# Altium PCB 频率PWM控制均可调模块.PcbDoc
Units mm, origin at the board's own origin, x right, y up, seen from the top; angles counter-clockwise.
Board outline 152.4 x 101.6 mm, 2 copper layers (Top Layer, Bottom Layer); 16 components, 12 nets, 53 pads, 0 vias.
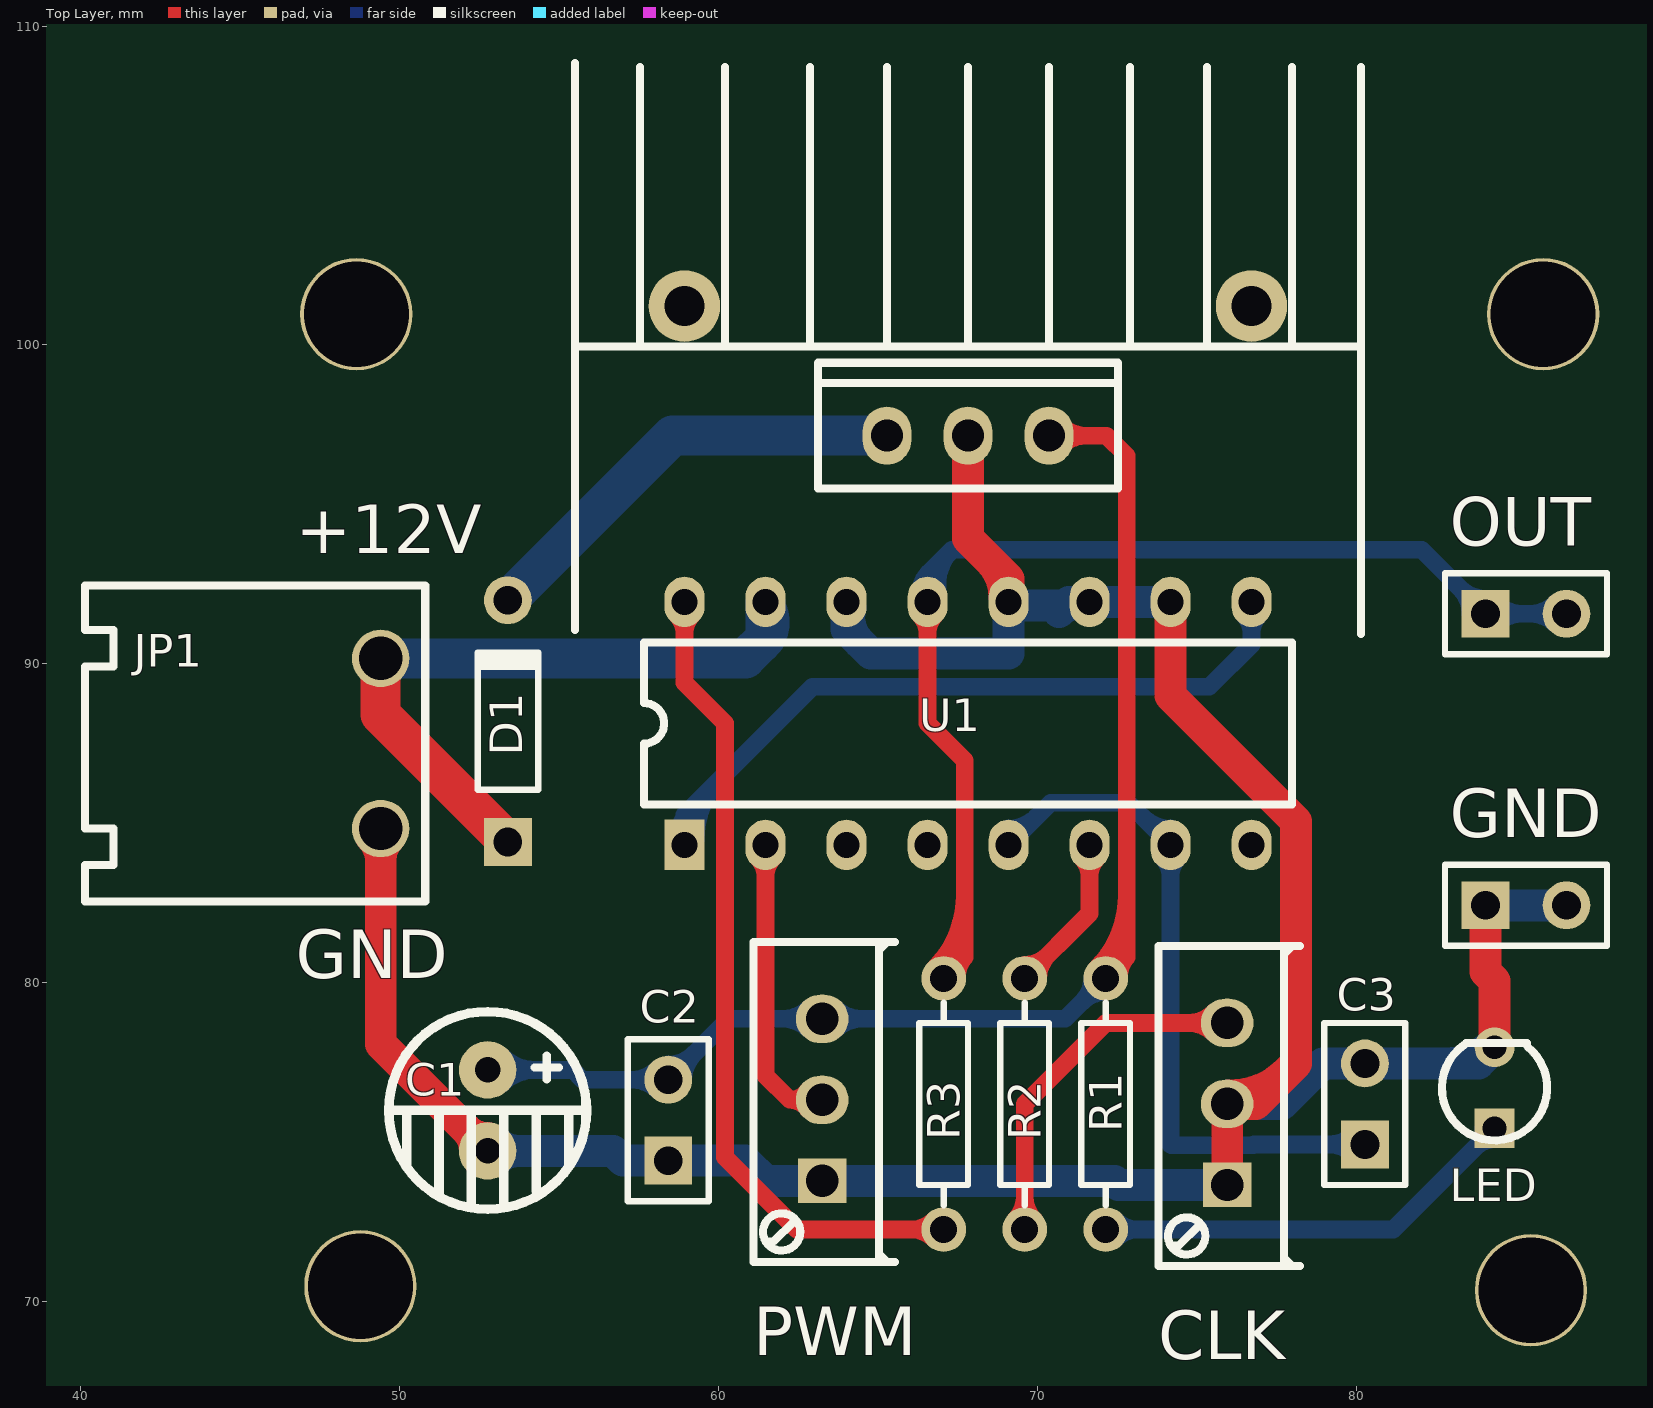
[diagram p0: Top Layer view]
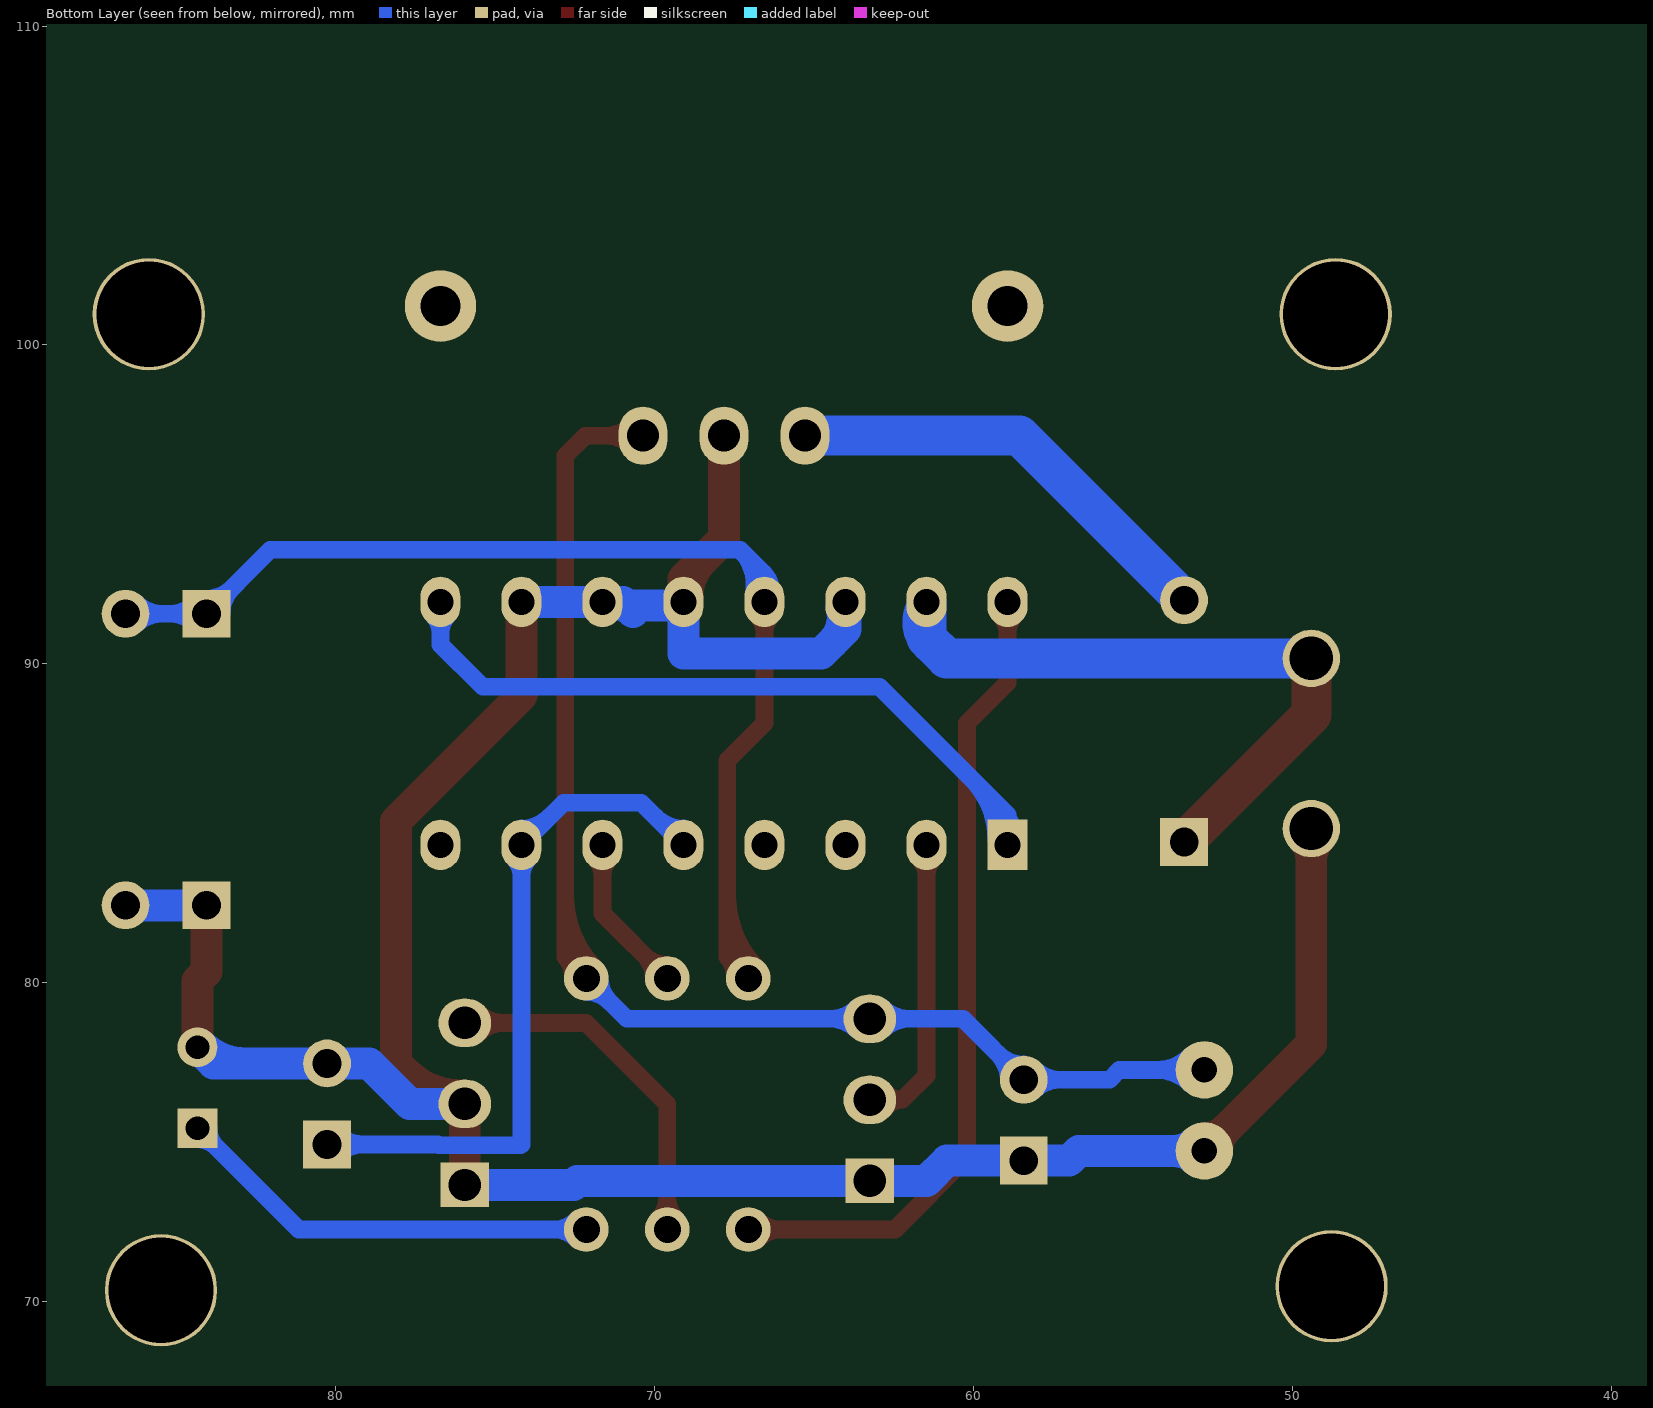
[diagram p1: Bottom Layer view, seen from below]

## Layer stack, top to bottom
Top Layer: signal copper 0.0356
Dielectric: dielectric 0.32, FR-4, Dk 4.8
Bottom Layer: signal copper 0.0356

## Board outline
25.4,25.4 177.8,25.4 177.8,127 25.4,127

## Design rules (kind name [scope] priority, off if disabled: settings)
Clearance [All] p1: gap=0.254
ComponentClearance [All] p1: gap=0.254 collisioncheckmode=3 verticalgap=0.254
PolygonConnect [All] p1: connectstyle=Relief reliefconductorwidth=0.254 reliefentries=4 polygonreliefangle="90 Angle"
RoutingVias [All] p1: holewidth=0.711 width=1.27 viastyle="Through Hole" minholewidth=0.711 minwidth=1.27 maxholewidth=0.711 maxwidth=1.27
SolderMaskExpansion [All] p1: expansion=0.102
TestPointUsage [All] p1: valid=0 allowmultiple=FALSE
Testpoint [All] p1: side=15 testpointundercomponent=TRUE minsize=1.016 maxsize=2.54 preferedsize=1.524 minholesize=0 maxholesize=1.016 preferedholesize=0.813 testpointgrid=0.025 style=1023 order=0-112345678
Width Width_3 [InNet('Net7805_1')] p1: maxlimit=1.254 minlimit=1.254 preferedwidth=1.254
Width Width_2 [InNet('VCC1')] p2: maxlimit=1.254 minlimit=1.254 preferedwidth=1.254
Width Width_1 [InNet('GND')] p3: maxlimit=1 minlimit=1 preferedwidth=1
Width [All] p4: maxlimit=0.554 minlimit=0.554 preferedwidth=0.554
17 further rules are at their usual default settings.

## Classes and differential pairs
component class 频率PWM控制均可调模块: C1 C2 C3 CLK D1 JP1 JP2 LED OUT PWM R1 R2 R3 U1

## Components (designator, comment, footprint, x,y, rotation, side; value= is the part's Value field where it differs from the comment)
7805 "" WYG 67.818,97.155 r0 top
C1 "" C-DJ-6 52.832,74.676 r270 top
C2 "" CPDR 58.42,75.692 r90 top
C3 "" CPDR 80.264,76.2 r90 top
CLK "" SIP3-D 76.2,73.66 r90 top (schematic designator P2)
D1 "" D-ZL-10 53.34,91.948 r90 top
GND "Comment" HDR-2 87.884,81.28 r0 top
JP1 "" JIKEKE 45.212,92.456 r0 top
LED "" LED_D 82.804,77.216 r90 top
OUT "Comment" HDR-2 87.884,90.424 r0 top
PWM "" SIP3-D 63.5,73.787 r90 top (schematic designator P1)
R1 "" RSE 72.136,76.2 r270 top
R2 "" RSE 69.596,76.2 r270 top
R3 "" RSE 67.056,76.2 r270 top
U1 "" DIP16 58.928,84.328 r90 top
? "" YA_20 67.818,93.599 r0 top

## Footprints (in the part's own frame and the unit in brackets; to place one, negate y for a bottom-side part, rotate by r counter-clockwise, add the part's x,y. Pads: shape width x height; smd on the part's side, far side on the other; paste and mask are expansions set on the pad)
C-DJ-6 [mm] "电容6mm"
  round 1.8 hole 0.8: 1(-2.591,-0.076) 2(-0.051,-0.076)
  silkscreen extent -4.42,-3.18 1.78,3.02
CPDR [mm] "瓷片电容"
  rect 1.5x1.5 hole 0.9: 1(-1.27,0)
  round 1.5 hole 0.9: 2(1.27,0)
  silkscreen extent -2.54,-1.27 2.54,1.27
D-ZL-10 [mm] "整流二极管"
  rect 1.5x1.5 hole 0.9: 1(-7.532,-0.051)
  round 1.5 hole 0.9: 2(0.048,-0.051)
  silkscreen extent -5.89,-1 -1.49,0.9
DIP16 [mil] "直插16管脚"
  rect 62x49.21 hole 32: 1(-0.15,-0.04)
  oval 62x49.21 hole 32: 2(-0.15,-100.04) 3(-0.15,-200.04) 4(-0.15,-300.04) 5(-0.15,-400.04) 6(-0.15,-500.04) 7(-0.15,-600.04) 8(-0.15,-700.04) 9(299.85,-700.04) 10(299.85,-600.04) 11(299.85,-500.04) 12(299.85,-400.04) 13(299.85,-300.04) 14(299.85,-200.04) 15(299.85,-100.04) 16(299.85,-0.04)
  silkscreen extent 50,-750 250,50
HDR-2 [mm] "2排针"
  rect 1.5x1.5 hole 0.9: 1(-3.84,1.148)
  round 1.5 hole 0.9: 2(-1.3,1.148)
  silkscreen extent -5.11,-0.12 -0.03,2.42
JIKEKE [mm] "可插拔接线端子"
  round 1.8 hole 1.362: 1(4.191,-2.286) 2(4.191,-7.62)
  silkscreen extent -5.08,-9.91 5.59,0
LED_D [mm] "发光二极管_3mm"
  rect 1.25x1.25 hole 0.75: 1(-1.778,-1.524)
  round 1.25 hole 0.75: 2(0.762,-1.524)
  silkscreen extent -2.16,-3.17 0.89,0.13
RSE [mm] "直插电阻1/8W"
  round 1.4 hole 0.85: 1(-3.937,0) 2(3.937,0)
  silkscreen extent -3.17,-0.76 3.17,0.76
SIP3-D [mil] "精调电位器"
  rect 55x60 hole 40: 1(0,10)
  oval 60x65 hole 40: 2(200,10) 3(100,10)
  silkscreen extent -100,-80 295,95
WYG [mm] "三端稳压器"
  oval 1.524x1.824 hole 1: 1(-2.54,0) 2(2.54,0) 3(0,0)
  silkscreen extent -4.7,-1.65 4.7,2.29
YA_20 [mm] "散热片YA-20"
  round 2.24 hole 1.262: 0(-8.89,7.62) 0(8.89,7.62)
  silkscreen extent -12.32,-2.67 12.32,15.24

## Part data
7805: library part SDWYG, "三端稳压器"
C1: library part DJDR, "电解电容"
C2: library part CPDR, "瓷片电容"
C3: library part "Cap Semi", "Capacitor (Semiconductor SIM Model)"
CLK PWM: library part RPot, "Potentiometer"
D1: library part "Diode 1N4007", "1 Amp General Purpose Rectifier"
JP1: library part PZ_2, "排针——2"
LED: library part LED2, "Typical RED, GREEN, YELLOW, AMBER GaAs LED"
R1 R2 R3: library part Res2, "Resistor"
U1: library part SG3525AN, "Pulse Width Modulator Control Circuit"

## Free pads (board coordinates)
  round 3.524 hole 3.3: 0(48.641,100.965) 1(48.768,70.485) 2(85.471,70.358) 3(85.852,100.965)

## Nets (pads, with @x,y where several pads share a name; then routed paths per layer and width w, separated by ;. In a path a pad name is that pad's centre, name@x,y a point inside that pad or via, vN(x,y) a via of type N, cw(c..) or ccw(c..) an arc to the next point about the centre after c; other vN are vias at no path point)
GND: 7805.3 C1.2 C2.1 C3.2 CLK.1 CLK.3 GND.1 GND.2 JP1.2 LED.2 PWM.1 U1.10 U1.11 U1.12 U1.14 | length 103.1
  Top Layer w1: JP1.2@49.12,84.553 cw(c48.437,83.87) 49.403,83.87 cw(c50.369,83.87) JP1.2@49.686,84.553 ; JP1.2 49.403,78.08 C1.2 ; C1.2@52.356,74.727 ccw(c51.39,74.727) 52.073,75.41 ccw(c52.756,76.092) C1.2@52.756,75.127 ; 7805.3 67.818,93.93 69.089,92.659 U1.12 ; 68.485,93.263 cw(c67.328,92.107) U1.12@68.964,92.107 ; U1.10 74.169,89.002 78.105,85.066 78.105,77.47 76.835,76.2 CLK.3 CLK.1 ; CLK.3@76.01,76.462 ccw(c76.01,79.087) 77.866,77.231 ; GND.1 84.044,80.345 84.328,80.061 LED.2
  Bottom Layer w1: C1.2 56.693,74.727 56.998,74.422 C2.1 60.833,74.422 61.468,73.787 PWM.1 72.415,73.787 72.542,73.66 CLK.1 ; C1.2@53.039,74.444 cw(c53.721,73.761) 53.721,74.727 cw(c53.721,75.692) C1.2@53.039,75.01 ; U1.14 64.009,91.083 64.77,90.322 69.089,90.322 U1.12@69.089,91.829 ; U1.14@64.13,91.75 ccw(c65.213,91.464) 64.421,90.672 ; U1.12 U1.12@69.089,91.829 ; 70.668,91.624 cw(c71.286,91.006) U1.11@71.586,91.827 ; U1.10 U1.11 70.989,91.944 70.873,91.829 U1.12@69.089,91.829 ; CLK.3 77.673,76.2 78.943,77.47 C3.2 83.82,77.47 LED.2 ; 82.8,77.47 ccw(c82.8,79.506) LED.2@84.24,78.066 ; GND.1 GND.2
Net7805_1: 7805.1 D1.2 | length 14
  Bottom Layer w1.254: D1.2 58.55,97.155 7805.1
NetC3_1: C3.1 U1.5 U1.7 | length 26.7
  Bottom Layer w0.554: U1.5 70.414,85.649 72.844,85.649 U1.7 74.169,74.929 74.193,74.905 76.759,74.905 76.784,74.93 C3.1 ; U1.5@69.089,84.835 ccw(c69.089,86.067) 69.96,85.195 ; 73.298,85.195 ccw(c74.169,86.067) U1.7@74.169,84.835 ; U1.7@73.923,83.916 cw(c73.329,83.322) 74.169,83.322 cw(c75.009,83.322) U1.7@74.415,83.916 ; C3.1@79.93,74.596 ccw(c79.122,73.788) 79.122,74.93 ccw(c79.122,76.072) C3.1@79.93,75.264
NetJP2_1: OUT.1 OUT.2 R3.1 U1.13 | length 50.2
  Top Layer w0.554: U1.13@66.303,91.536 cw(c65.709,90.942) 66.549,90.942 cw(c67.389,90.942) U1.13@66.795,91.536 ; U1.13 66.549,88.138 67.716,86.971 67.716,80.797 ; R3.1@66.757,80.436 ccw(c64.44,82.753) 67.716,82.753 ; R3.1 67.716,80.797 ; R3.1@67.084,80.559 ccw(c67.137,81.377) 67.716,80.797 ; R3.1@67.149,80.044 ccw(c65.778,81.415) 67.716,81.415 ; R3.1@67.478,80.165 cw(c68.296,80.218) 67.716,80.797
  Bottom Layer w0.554: U1.13@66.337,92.382 ccw(c66.005,92.814) 66.549,92.814 ; U1.13@66.347,92.065 cw(c67.19,92.238) 66.582,92.846 ; U1.13 66.549,92.814 ; U1.13@66.761,92.382 cw(c67.093,92.814) 66.549,92.814 ; U1.13@66.89,92.176 cw(c68.399,92.485) 67.31,93.575 ; OUT.1@83.571,91.572 ccw(c82.429,91.572) 83.237,92.379 ccw(c84.044,93.187) OUT.1@84.044,92.045 ; OUT.1@84.378,91.238 cw(c85.186,90.43) 85.186,91.572 cw(c85.186,92.714) OUT.1@84.378,91.906 ; OUT.2@86.25,91.238 ccw(c85.442,90.43) 85.442,91.572 ccw(c85.442,92.714) OUT.2@86.25,91.906 ; OUT.2 OUT.1 82.041,93.575 67.31,93.575 ; 66.549,92.814 67.31,93.575
NetLED_1: LED.1 R1.2 | length 16.4
  Bottom Layer w0.554: R1.2 81.153,72.263 LED.1 ; R1.2@72.435,71.964 cw(c73.157,71.242) 73.157,72.263 cw(c73.157,73.284) R1.2@72.435,72.562 ; LED.1@83.98,75.438 cw(c83.14,75.438) 83.734,74.844 cw(c84.328,74.25) LED.1@84.328,75.09
NetP1_3: PWM.3 U1.2 | length 12
  Top Layer w0.554: U1.2@61.223,83.916 cw(c60.629,83.322) 61.469,83.322 cw(c62.309,83.322) U1.2@61.715,83.916 ; U1.2 61.469,77.088 62.23,76.327 ; PWM.3@62.79,76.042 ccw(c62.23,75.634) 62.23,76.327 ; PWM.3@62.79,76.612 cw(c62.23,77.02) 62.23,76.327 ; PWM.3 62.23,76.327
NetP2_2: CLK.2 R2.2 | length 14.8
  Top Layer w0.554: R2.2@69.297,72.562 ccw(c68.575,73.284) 69.596,73.284 ccw(c70.617,73.284) R2.2@69.895,72.562 ; R2.2 69.596,76.2 72.136,78.74 CLK.2 ; CLK.2@75.54,78.397 ccw(c74.712,77.569) 74.712,78.74 ccw(c74.712,79.911) CLK.2@75.54,79.083
NetR2_1: R2.1 U1.6 | length 8
  Top Layer w0.554: R2.1 71.629,82.17 U1.6 ; R2.1@69.596,80.56 ccw(c69.596,81.581) 70.318,80.859 ccw(c71.04,80.137) R2.1@70.019,80.137 ; U1.6@71.383,83.916 cw(c70.789,83.322) 71.629,83.322 cw(c72.469,83.322) U1.6@71.875,83.916
NetR3_2: R3.2 U1.16 | length 28.7
  Top Layer w0.554: U1.16@58.683,91.536 cw(c58.089,90.942) 58.929,90.942 cw(c59.769,90.942) U1.16@59.175,91.536 ; U1.16 58.929,89.407 60.198,88.138 60.198,74.524 62.459,72.263 R3.2 ; R3.2@66.757,71.964 ccw(c66.035,71.242) 66.035,72.263 ccw(c66.035,73.284) R3.2@66.757,72.562
NetU1_1: U1.1 U1.9 | length 28
  Bottom Layer w0.554: U1.1@58.696,84.745 ccw(c58.224,85.269) 58.929,85.269 ; U1.1@58.723,84.487 cw(c60.114,84.487) 59.13,85.47 ; U1.1 58.929,85.269 ; U1.1@59.162,84.745 cw(c59.634,85.269) 58.929,85.269 ; U1.1@59.277,84.487 cw(c62.006,84.487) 60.076,86.416 ; U1.9@76.463,91.536 cw(c75.869,90.942) 76.709,90.942 cw(c77.549,90.942) U1.9@76.955,91.536 ; U1.9 76.709,90.602 75.388,89.281 62.941,89.281 58.929,85.269
VCC1: D1.1 JP1.1 U1.15 | length 22.1
  Top Layer w1.254: JP1.1 49.403,88.404 D1.1
  Bottom Layer w1.254: JP1.1 60.834,90.17 61.469,90.805 U1.15 ; 61.322,90.658 ccw(c60.664,91.317) U1.15@61.471,91.783
VCC2: 7805.2 C1.1 C2.2 PWM.2 R1.1 | length 58.7
  Top Layer w0.554: 7805.2 72.161,97.155 72.796,96.52 72.796,80.797 ; 7805.2@70.701,96.812 cw(c71.529,95.984) 71.529,97.155 cw(c71.529,98.326) 7805.2@70.701,97.498 ; R1.1@71.837,80.436 ccw(c69.52,82.753) 72.796,82.753 ; R1.1 72.796,80.797 ; R1.1@72.164,80.559 ccw(c72.217,81.377) 72.796,80.797 ; R1.1@72.229,80.044 ccw(c70.858,81.415) 72.796,81.415 ; R1.1@72.558,80.165 cw(c73.376,80.218) 72.796,80.797
  Bottom Layer w0.554: C1.1 55.423,77.267 55.728,76.962 C2.2 60.325,78.867 PWM.2 70.866,78.867 R1.1 ; C1.1@53.196,76.826 cw(c54.26,75.763) 54.26,77.267 cw(c54.26,78.771) C1.1@53.196,77.707 ; C2.2@58.086,76.628 ccw(c57.278,75.82) 57.278,76.962 ccw(c57.278,78.104) C2.2@58.086,77.296 ; C2.2@58.42,77.435 ccw(c58.42,78.577) 59.227,77.769 ccw(c60.035,76.962) C2.2@58.893,76.962 ; PWM.2@62.84,78.524 ccw(c62.012,77.696) 62.012,78.867 ccw(c62.012,80.038) PWM.2@62.84,79.21 ; PWM.2@63.652,78.524 cw(c64.48,77.696) 64.48,78.867 cw(c64.48,80.038) PWM.2@63.652,79.21 ; R1.1@71.713,80.137 cw(c70.692,80.137) 71.414,79.415 cw(c72.136,78.693) R1.1@72.136,79.714
pads on no net: ?.0 U1.3 U1.4 U1.8

## Silkscreen, mask and mechanical layers (free items; w line width, h text height)
Top Overlay:
  text "+12V" at 46.736,93.472 h1.52
  text "GND" at 46.736,80.137 h1.52
Mechanical 1:
  lines w0.254: 45.593,68.707 45.72,102.743 47.117,104.14 ; 45.72,66.294 45.974,66.04 ; 45.72,68.707 47.117,67.31 ; 45.974,67.31 87.503,67.31 88.9,68.707 88.9,102.743 87.503,104.14 ; 46.99,104.14 87.63,104.14